# EAGLE board RelayBoard (EAGLE 4.13)
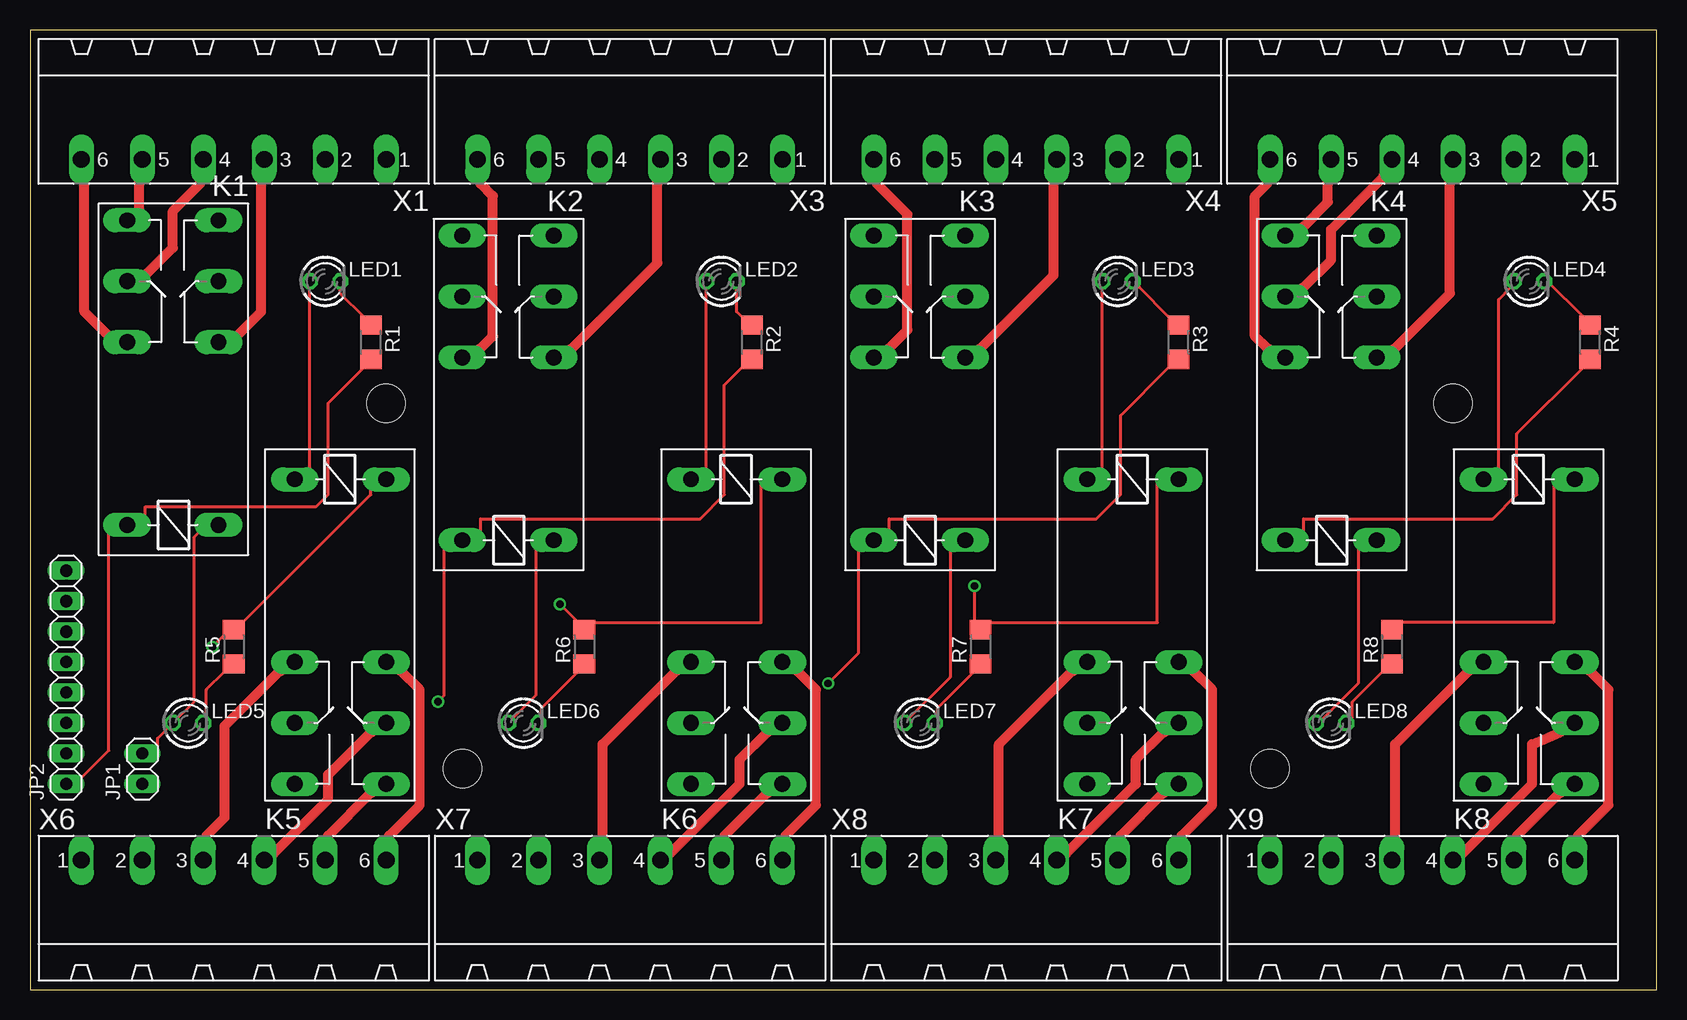
[diagram p0: board, top side]
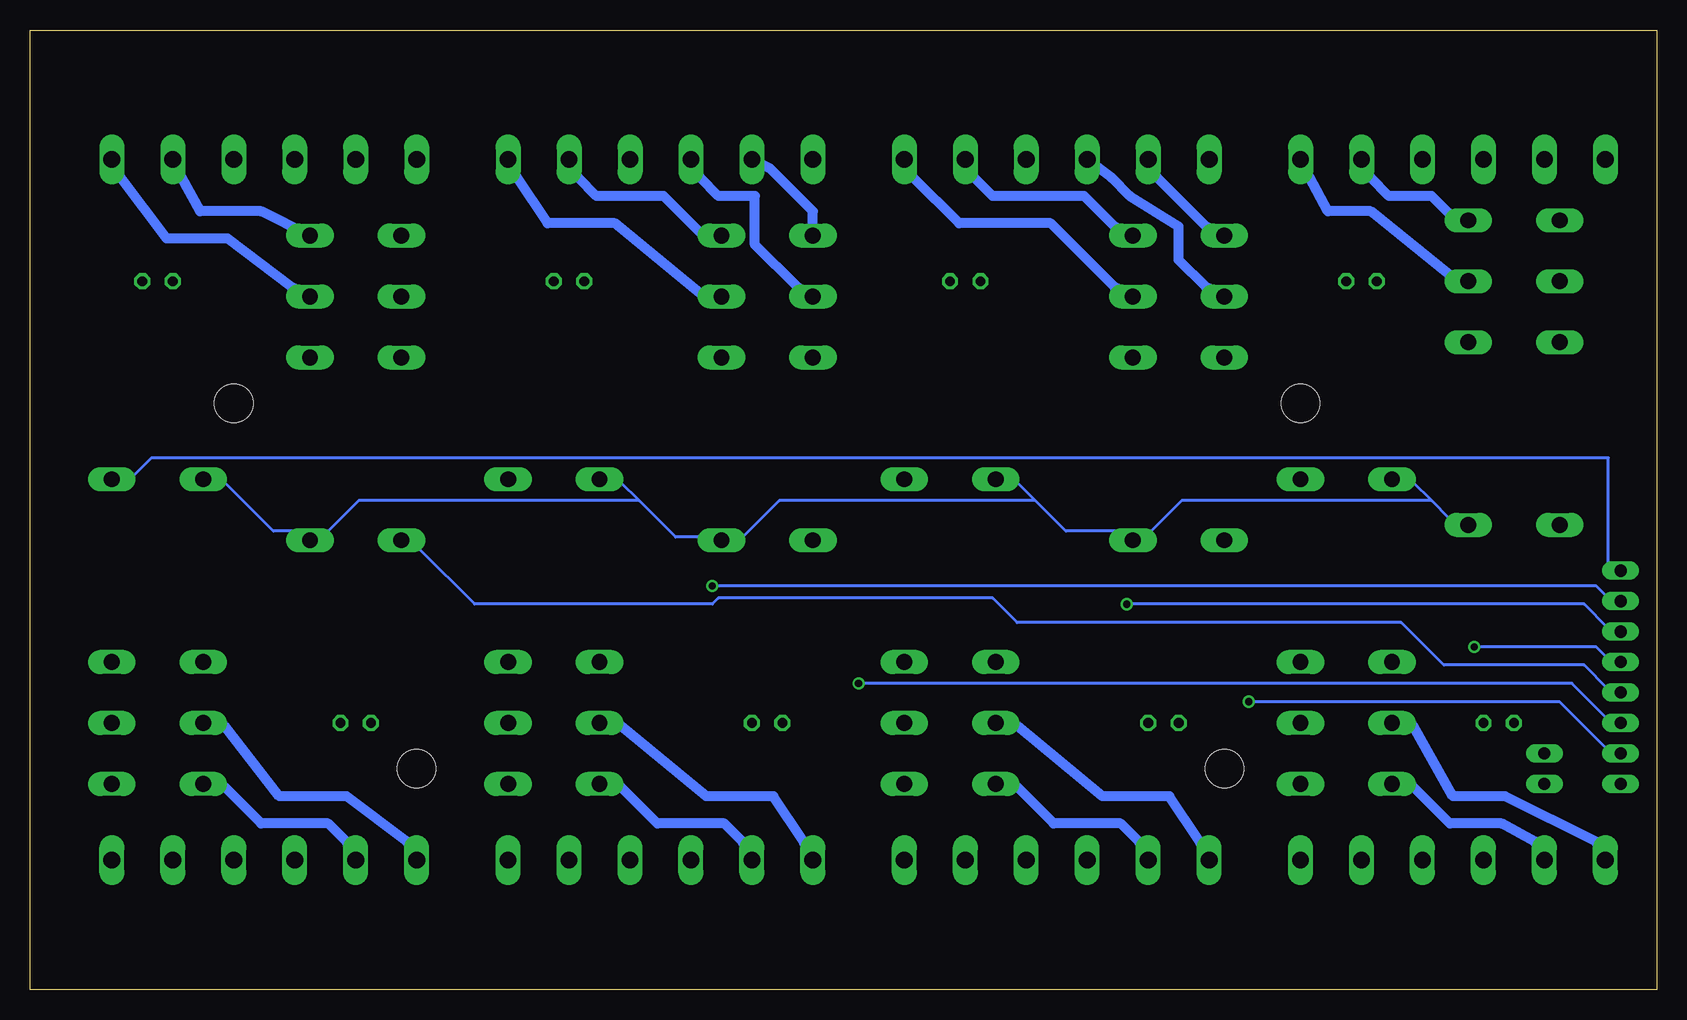
[diagram p1: board, bottom side, seen from below]

Size 135.56 x 80 mm. Coordinates in mm from the lower left corner, seen from the top.
Outline: 0,0 135.56,0 135.56,80 0,80 0,0
Copper layers (1*16): Top 0.035mm / dielectric 1.5mm / Bottom 0.035mm
Design rules "default": minimum track width 10mil, minimum drill 24mil, track to track 16mil, track to pad 16mil, pad to pad 16mil, via to via 16mil, smd to smd 8mil, copper to edge 40mil, drill to drill 8mil, minimum pad ring 10mil, minimum via ring 8mil, stop-mask expansion 4mil, vias tented up to drill 0mil, thermal gap 10mil
Holes 3.2 mm at 29.68,48.89 118.58,48.89 36.03,18.41 103.34,18.41

## Footprints (pad centres in the part's own frame; a part is rotated, then mirrored left to right if it is on the bottom)
1X02 = drill 1.016 long: 1 -1.27,0; 2 1.27,0
1X08 = drill 1.016 long: 1 -8.89,0; 2 -6.35,0; 3 -3.81,0; 4 -1.27,0; 5 1.27,0; 6 3.81,0; 7 6.35,0; 8 8.89,0
F4052 = drill 1.321 long: 1 -3.81,3.81; 2 -3.81,-3.81; O1 11.43,-3.81; O2 11.43,3.81; P1 16.51,-3.81; P2 16.51,3.81; S1 21.59,-3.81; S2 21.59,3.81
LED3MM = drill 0.813 octagon: A -1.27,0; K 1.27,0
R1206 = smd 1.6 x 1.803: 1 -1.422,0; 2 1.422,0
MSTBA6 = drill 1.397 long: 1 -12.7,5.08; 2 -7.62,5.08; 3 -2.54,5.08; 4 2.54,5.08; 5 7.62,5.08; 6 12.7,5.08

## Placement (x,y rotation side)
JP1  [1X02]  9.36,18.41 90 top
JP2  [1X08]  3.01,26.03 90 top
K1  4052  [F4052]  11.9,42.54 90 top
K2  4052  [F4052]  39.84,41.27 90 top
K3  4052  [F4052]  74.13,41.27 90 top
K4  4052  [F4052]  108.42,41.27 90 top
K5  4052  [F4052]  25.87,38.73 270 top
K6  4052  [F4052]  58.89,38.73 270 top
K7  4052  [F4052]  91.91,38.73 270 top
K8  4052  [F4052]  124.93,38.73 270 top
LED1  [LED3MM]  24.6,59.05 0 top
LED2  [LED3MM]  57.62,59.05 0 top
LED3  [LED3MM]  90.64,59.05 0 top
LED4  [LED3MM]  124.93,59.05 0 top
LED5  [LED3MM]  13.17,22.22 0 top
LED6  [LED3MM]  41.11,22.22 0 top
LED7  [LED3MM]  74.13,22.22 0 top
LED8  [LED3MM]  108.42,22.22 0 top
R1  [R1206]  28.41,53.97 270 top
R2  [R1206]  60.16,53.97 270 top
R3  [R1206]  95.72,53.97 270 top
R4  [R1206]  130.01,53.97 270 top
R5  [R1206]  16.98,28.57 90 top
R6  [R1206]  46.19,28.57 90 top
R7  [R1206]  79.21,28.57 90 top
R8  [R1206]  113.5,28.57 90 top
X1  MSTBA6  [MSTBA6]  16.98,74.29 180 top
X3  MSTBA6  [MSTBA6]  50,74.29 180 top
X4  MSTBA6  [MSTBA6]  83.02,74.29 180 top
X5  MSTBA6  [MSTBA6]  116.04,74.29 180 top
X6  MSTBA6  [MSTBA6]  16.98,5.71 0 top
X7  MSTBA6  [MSTBA6]  50,5.71 0 top
X8  MSTBA6  [MSTBA6]  83.02,5.71 0 top
X9  MSTBA6  [MSTBA6]  116.04,5.71 0 top

## Library data of the parts
JP1 JP2 = pinhead
K1-K8 = relay
LED1-LED8 = led
R1-R8 = rcl
X1 X3-X9 = con-phoenix-508

## Nets
N$1: K1.P2 X1.4
N$2: K1.S2 X1.5
N$3: K1.O2 X1.6
N$4: K1.P1 X1.1
N$5: K1.S1 X1.2
N$6: K1.O1 X1.3
N$7: K2.P2 X3.4
N$8: K2.S2 X3.5
N$9: K2.O2 X3.6
N$10: K2.P1 X3.1
N$11: K2.S1 X3.2
N$12: K2.O1 X3.3
N$13: K3.P2 X4.4
N$14: K3.S2 X4.5
N$15: K3.O2 X4.6
N$16: K3.P1 X4.1
N$17: K3.S1 X4.2
N$18: K3.O1 X4.3
N$19: K4.P2 X5.4
N$20: K4.S2 X5.5
N$21: K4.O2 X5.6
N$22: K4.P1 X5.1
N$23: K4.S1 X5.2
N$24: K4.O1 X5.3
N$25: JP2.1 K1.1 R1.2
N$26: JP2.2 K2.1 R2.2
N$27: JP2.3 K3.1 R3.2
N$28: JP2.4 K4.1 R4.2
N$29: LED1.K R1.1
N$30: K5.P1 X6.1
N$31: K5.S1 X6.2
N$32: K5.O1 X6.3
N$33: K5.P2 X6.4
N$34: K5.S2 X6.5
N$35: K5.O2 X6.6
N$36: K6.P1 X7.1
N$37: K6.S1 X7.2
N$38: K6.O1 X7.3
N$39: K6.P2 X7.4
N$40: K6.S2 X7.5
N$41: K6.O2 X7.6
N$42: K7.P1 X8.1
N$43: K7.S1 X8.2
N$44: K7.O1 X8.3
N$45: K7.P2 X8.4
N$46: K7.S2 X8.5
N$47: K7.O2 X8.6
N$48: K8.P1 X9.1
N$49: K8.S1 X9.2
N$50: K8.O1 X9.3
N$51: K8.P2 X9.4
N$52: K8.S2 X9.5
N$53: K8.O2 X9.6
N$54: JP2.5 K5.1 R5.2
N$55: JP2.6 K6.1 R6.2
N$56: JP2.7 K7.1 R7.2
N$57: JP2.8 K8.1 R8.2
N$58: JP1.2 K1.2 K2.2 K3.2 K4.2 K5.2 K6.2 K7.2 K8.2 LED1.A LED2.A LED3.A LED4.A LED5.A LED6.A LED7.A LED8.A
N$59: LED2.K R2.1
N$60: LED3.K R3.1
N$61: LED4.K R4.1
N$62: LED5.K R5.1
N$63: LED6.K R6.1
N$64: LED7.K R7.1
N$65: LED8.K R8.1

## Tracks (layer width: path | path; a pad name or v marks a point on that pad's centre or on a via)
N$1
  Top 0.813: K1.P2 9.61,59.56 11.9,61.84 11.9,64.89 14.19,67.18 X1.4
N$2
  Top 0.813: K1.S2 9.11,64.64 9.11,67.18 X1.5
N$3
  Top 0.813: K1.O2 6.57,54.48 4.53,56.51 4.53,67.18 X1.6
N$4
  Bottom 0.813: K1.P1 17.23,59.56 23.84,64.89 27.39,64.89 28.92,67.69 X1.1
N$5
  Bottom 0.813: K1.S1 17.23,64.64 18.76,66.16 22.31,66.16 23.84,67.69 X1.2
N$6
  Top 0.813: K1.O1 17.23,54.48 19.27,56.51 19.27,67.18 X1.3
N$7
  Bottom 0.813: K2.P2 37.55,58.54 39.84,60.83 39.84,63.62 43.9,66.16 45.43,67.69 X3.4
N$8
  Bottom 0.813: K2.S2 37.55,63.62 41.62,67.69 X3.5
N$9
  Top 0.813: K2.O2 37.55,53.46 38.57,54.48 38.57,66.16 37.55,67.18 X3.6
N$10
  Bottom 0.813: K2.P1 45.17,58.54 50.51,63.88 58.13,63.88 61.94,67.69 X3.1
N$11
  Bottom 0.813: K2.S1 45.17,63.62 47.71,66.16 55.33,66.16 56.86,67.69 X3.2
N$12
  Top 0.813: K2.O1 45.17,53.46 52.29,60.57 52.29,67.18 X3.3
N$13
  Bottom 0.813: K3.P2 71.59,58.54 75.15,62.1 75.15,66.16 78.19,66.16 79.72,67.69 X4.4
N$14
  Bottom 0.813: K3.S2 70.32,64.89 73.88,68.45 X4.5
N$15
  Top 0.813: K3.O2 71.59,53.46 73.11,54.99 73.11,64.64 70.57,67.18 X4.6
N$16
  Bottom 0.813: K3.P1 79.72,58.03 86.83,63.88 92.42,63.88 94.96,67.69 X4.1
N$17
  Bottom 0.813: K3.S1 79.72,63.11 82.77,66.16 88.35,66.16 89.88,67.69 X4.2
N$18
  Top 0.813: K3.O1 79.21,53.46 85.31,59.56 85.31,67.18 X4.3
N$19
  Top 0.813: K4.P2 106.13,58.54 108.42,60.83 108.42,63.37 112.74,67.69 X5.4
N$20
  Top 0.813: K4.S2 106.13,63.62 108.17,65.65 108.17,67.18 X5.5
N$21
  Top 0.813: K4.O2 103.09,53.46 102.07,54.48 102.07,66.16 103.09,67.18 X5.6
N$22
  Bottom 0.813: K4.P1 113.75,58.54 119.09,62.61 124.17,62.61 127.98,67.69 X5.1
N$23
  Bottom 0.813: K4.S1 116.29,64.89 121.37,64.89 122.9,67.69 X5.2
N$24
  Top 0.813: K4.O1 113.75,53.46 118.33,58.03 118.33,67.18 X5.3
N$25
  Top 0.254: R1.2 27.9,51.94 24.85,48.89 24.85,41.27 23.84,40.25 9.61,40.25 9.61,39.24 K1.1 6.57,38.22 6.57,19.93 4.03,17.39 JP2.1
N$26  (via drill 0.61)
  Top 0.254: R2.2 59.4,51.94 57.87,50.41 57.87,41.27 55.84,39.24 37.55,39.24 37.55,38.22 K2.1 34.51,36.7 34.51,24.51 v34,24
  Bottom 0.254: v34,24 8.09,24 4.03,19.93 JP2.2
N$27  (via drill 0.61)
  Top 0.254: R3.2 94.96,51.94 90.89,47.87 90.89,41.27 88.86,39.24 71.59,39.24 71.59,38.22 K3.1 69.05,36.7 69.05,28.06 v66.51,25.52
  Bottom 0.254: v66.51,25.52 7.07,25.52 4.03,22.47 JP2.3
N$28
  Top 0.254: R4.2 129.5,51.94 123.91,46.35 123.91,41.27 121.88,39.24 106.13,39.24 106.13,38.22 K4.1
  Bottom 0.254: JP2.4 4.03,25.01 6.06,27.05 17.74,27.05 21.3,30.6 53.3,30.6 55.33,32.63 78.19,32.63 78.7,32.13 98.51,32.13 103.09,36.7 K4.1
N$29
  Top 0.254: R1.1 27.9,56 25.87,58.03 LED1.K
N$30
  Bottom 0.813: K5.P1 20.28,21.97 16.98,16.12 12.66,16.12 5.04,12.31 X6.1
N$31
  Bottom 0.813: K5.S1 20.28,16.89 17.23,13.84 12.92,13.84 10.12,12.31 X6.2
N$32
  Top 0.813: K5.O1 20.79,26.54 16.22,21.97 16.22,14.35 14.69,12.82 X6.3
N$33
  Top 0.813: K5.P2 28.41,21.46 24.85,17.9 24.85,15.87 20.28,11.3 X6.4
N$34
  Top 0.813: K5.S2 28.41,16.38 24.85,12.82 X6.5
N$35
  Top 0.813: K5.O2 30.95,26.54 32.47,25.01 32.47,15.36 29.93,12.82 X6.6
N$36
  Bottom 0.813: K6.P1 53.3,21.97 46.19,16.12 40.6,16.12 38.06,12.31 X7.1
N$37
  Bottom 0.813: K6.S1 53.3,16.89 50.25,13.84 44.67,13.84 43.14,12.31 X7.2
N$38
  Top 0.813: K6.O1 53.81,26.54 47.71,20.44 47.71,12.82 X7.3
N$39
  Top 0.813: K6.P2 61.43,21.46 59.14,19.17 59.14,17.14 53.3,11.3 X7.4
N$40
  Top 0.813: K6.S2 61.43,16.38 57.87,12.82 X7.5
N$41
  Top 0.813: K6.O2 63.97,26.54 65.49,25.01 65.49,15.36 62.95,12.82 X7.6
N$42
  Bottom 0.813: K7.P1 86.32,21.97 79.21,16.12 73.62,16.12 71.08,12.31 X8.1
N$43
  Bottom 0.813: K7.S1 86.32,16.89 83.27,13.84 77.69,13.84 76.16,12.31 X8.2
N$44
  Top 0.813: K7.O1 86.83,26.54 80.73,20.44 80.73,12.82 X8.3
N$45
  Top 0.813: K7.P2 94.45,21.46 92.16,19.17 92.16,17.14 86.32,11.3 X8.4
N$46
  Top 0.813: K7.S2 94.45,16.38 90.89,12.82 X8.5
N$47
  Top 0.813: K7.O2 96.99,26.54 98.51,25.01 98.51,15.36 95.97,12.82 X8.6
N$48
  Bottom 0.813: K8.P1 119.34,21.97 114.77,16.12 109.18,16.12 104.1,12.31 X9.1
N$49
  Bottom 0.813: K8.S1 119.34,16.89 116.29,13.84 110.71,13.84 109.18,12.31 X9.2
N$50
  Top 0.813: K8.O1 119.85,26.54 113.75,20.44 113.75,12.82 X9.3
N$51
  Top 0.813: K8.P2 127.47,21.46 125.18,20.44 125.18,17.14 119.34,11.3 X9.4
N$52
  Top 0.813: K8.S2 127.47,16.38 123.91,12.82 X9.5
N$53
  Top 0.813: K8.O2 130.01,26.54 131.53,25.01 131.53,15.36 128.99,12.82 X9.6
N$54  (via drill 0.61)
  Top 0.254: K5.1 28.41,41.78 28.41,41.27 17.74,30.6 R5.2 16.22,29.59 v15.2,28.57
  Bottom 0.254: v15.2,28.57 5.04,28.57 4.03,27.55 JP2.5
N$55  (via drill 0.61)
  Top 0.254: K6.1 60.92,42.29 60.92,30.6 46.7,30.6 R6.2 45.68,30.6 v44.16,32.13
  Bottom 0.254: v44.16,32.13 6.06,32.13 4.03,30.09 JP2.6
N$56  (via drill 0.61)
  Top 0.254: K7.1 93.94,42.29 93.94,30.6 79.72,30.6 R7.2 78.7,30.6 v78.7,33.65
  Bottom 0.254: v78.7,33.65 5.04,33.65 4.03,32.63 JP2.7
N$57
  Top 0.254: R8.2 114.26,30.6 126.96,30.6 126.96,42.29 K8.1
  Bottom 0.254: JP2.8 4.03,35.17 4.03,44.32 125.44,44.32 126.96,42.79 K8.1
N$58
  Top 0.254: LED4.A 123.41,58.54 122.39,57.53 122.39,43.3 K8.2 | LED8.A 107.66,22.47 110.71,25.52 110.71,36.7 K4.2 | LED3.A 89.37,43.3 K7.2 | LED7.A 76.67,26.03 76.67,36.7 K3.2 | LED2.A 56.35,43.3 K6.2 | LED6.A 42.13,24.51 42.13,36.7 K2.2 | JP1.2 10.63,19.93 10.63,20.95 LED5.A 13.68,24 13.68,37.71 14.19,38.22 K1.2 | LED1.A 23.33,43.3 K5.2
  Bottom 0.254: K8.2 119.34,42.29 115.28,38.22 113.75,38.22 K4.2 110.71,38.22 108.17,40.76 84.8,40.76 | 84.8,40.76 81.75,37.71 79.72,37.71 K3.2 76.16,37.71 73.11,40.76 51.78,40.76 | 84.8,40.76 86.32,42.29 K7.2 | 51.78,40.76 49.24,38.22 45.17,38.22 K2.2 42.13,38.22 39.59,40.76 18.76,40.76 | 51.78,40.76 53.3,42.29 K6.2 | 18.76,40.76 20.28,42.29 K5.2 | 18.76,40.76 17.23,39.24 K1.2
N$59
  Top 0.254: R2.1 59.4,56 58.89,56.51 LED2.K
N$60
  Top 0.254: R3.1 94.96,56 92.42,58.54 92.42,59.05 LED3.K
N$61
  Top 0.254: R4.1 129.5,56 126.45,59.05 LED4.K
N$62
  Top 0.254: R5.1 16.22,26.54 14.69,25.01 14.69,22.47 LED5.K
N$63
  Top 0.254: R6.1 45.68,26.54 42.63,23.49 42.63,22.47 LED6.K
N$64
  Top 0.254: R7.1 78.7,26.54 75.65,23.49 75.65,22.47 LED7.K
N$65
  Top 0.254: R8.1 112.74,26.54 110.2,24 110.2,22.47 LED8.K